# EAGLE board Telemetry Board 3 (EAGLE 7.6.0)
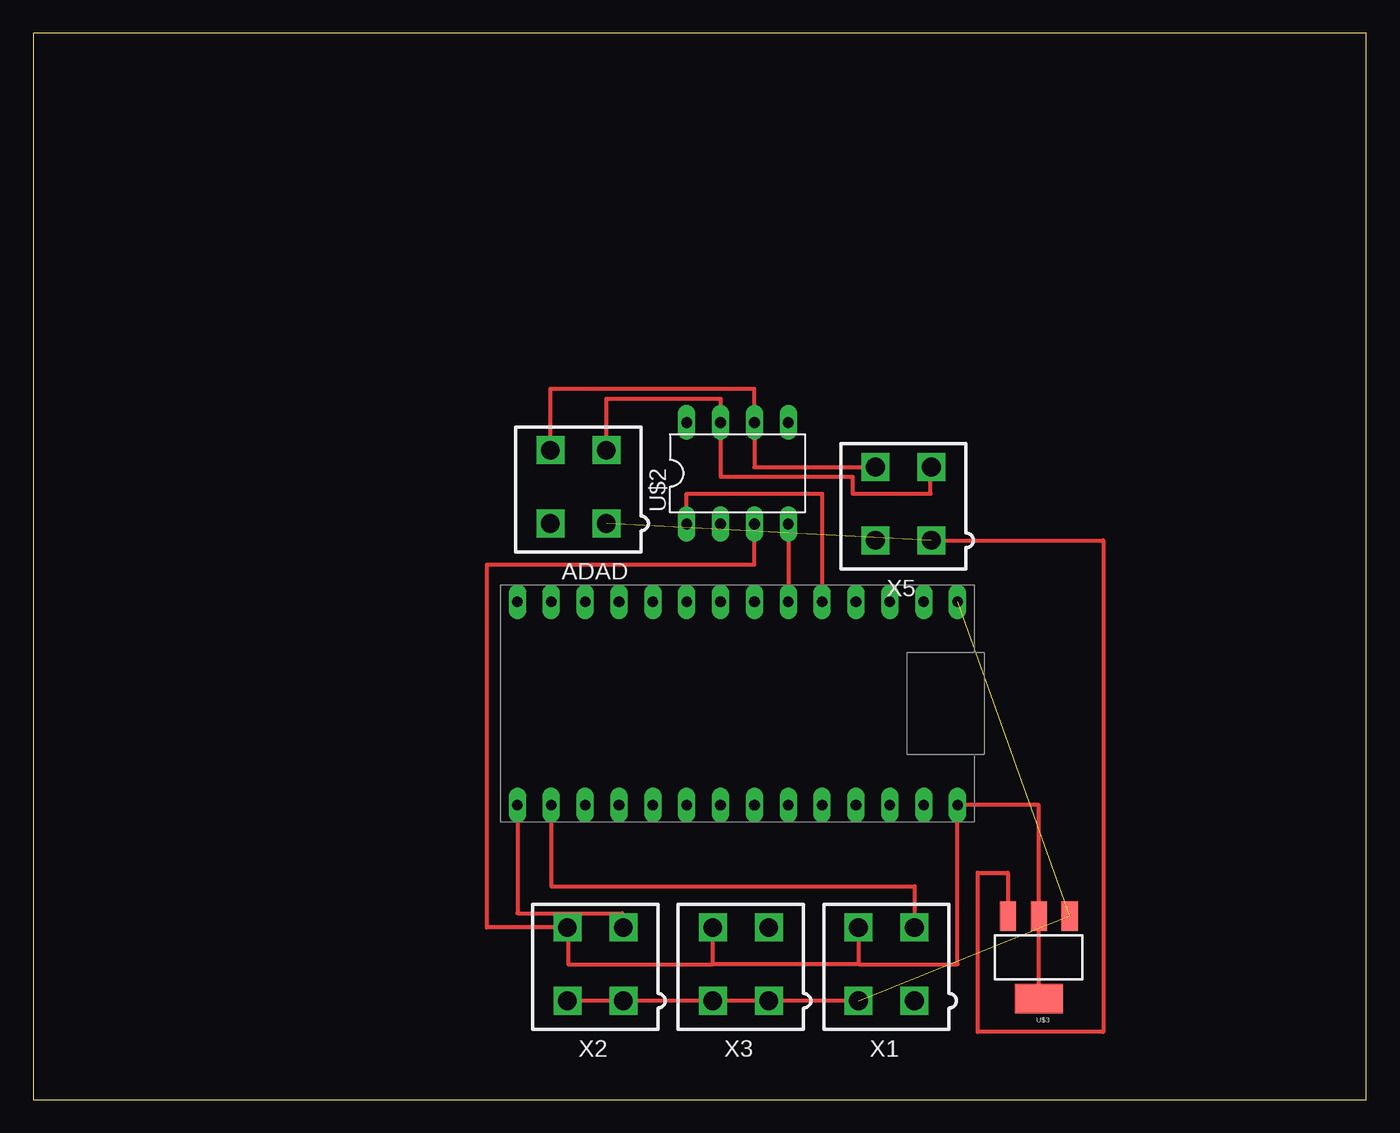
[diagram p0: board, top side]
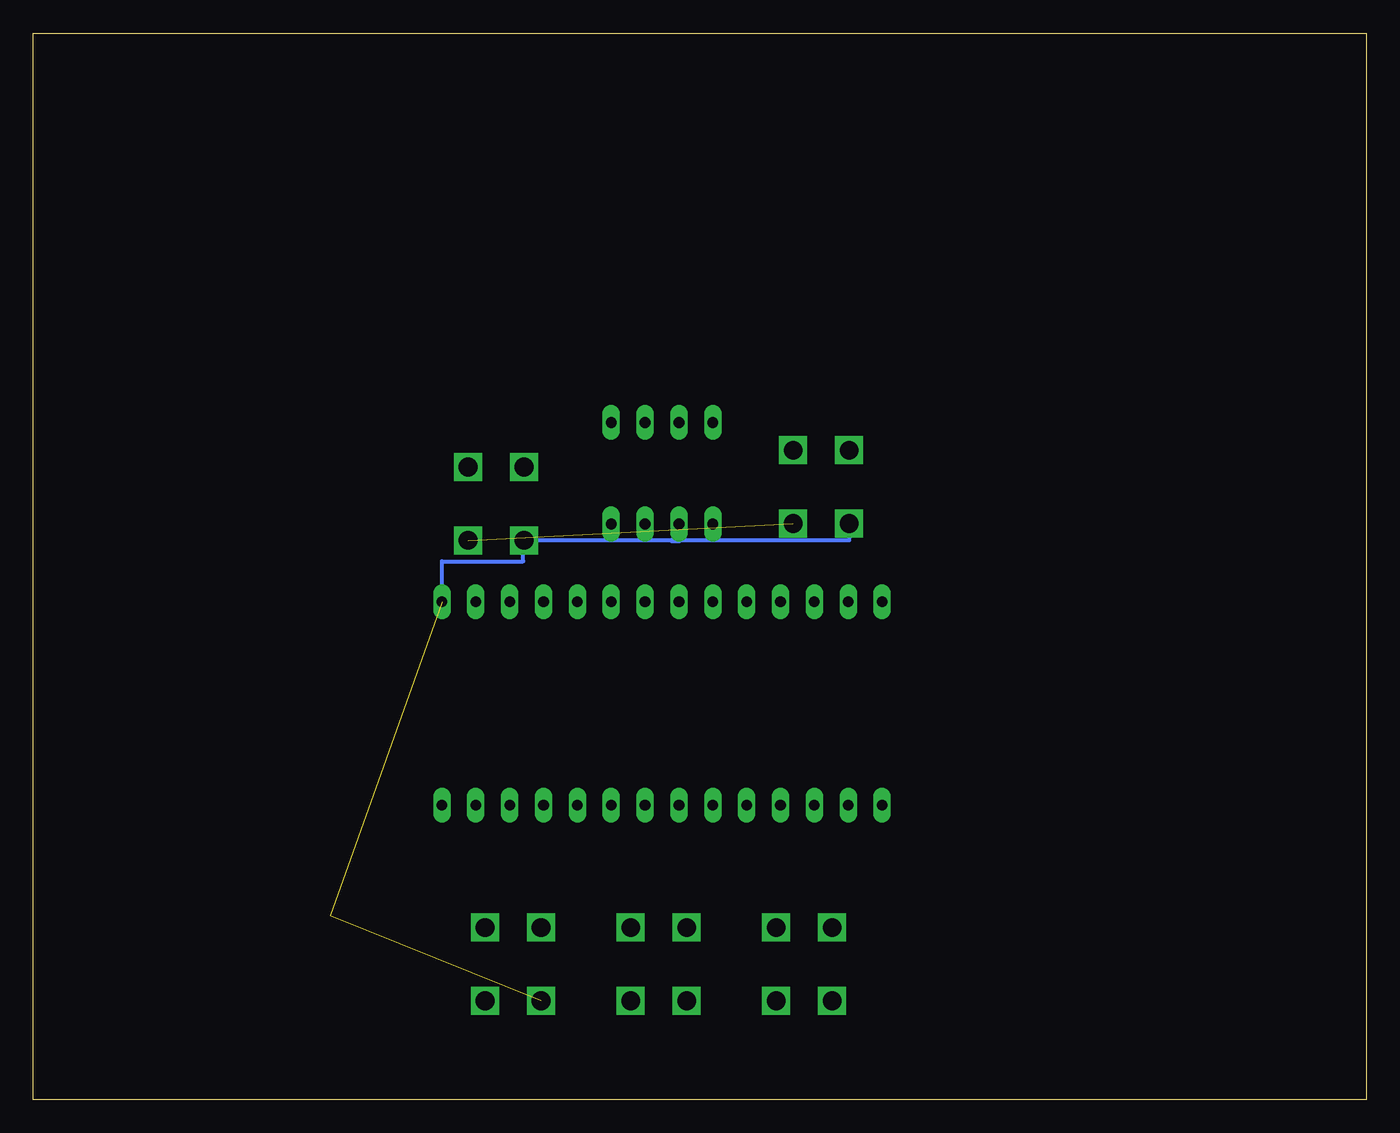
[diagram p1: board, bottom side, seen from below]

Size 100 x 80 mm. Coordinates in mm from the lower left corner, seen from the top.
Outline: 0,0 100,0 100,80 0,80 0,0
Copper layers (1*16): Top 0.035mm / dielectric 1.5mm / Bottom 0.035mm
Design rules "default": minimum track width 10mil, minimum drill 24mil, track to track 8mil, track to pad 8mil, pad to pad 8mil, via to via 8mil, smd to smd 8mil, copper to edge 40mil, drill to drill 8mil, minimum pad ring 10mil, minimum via ring 8mil, stop-mask expansion 4mil, vias tented up to drill 0mil, thermal gap 10mil

## Footprints (pad centres in the part's own frame; a part is rotated, then mirrored left to right if it is on the bottom)
MINIFIT_5566-4 = drill 1.4 square: 1 2.1,-2.75; 2 -2.1,-2.75; 3 2.1,2.75; 4 -2.1,2.75
TEENSY_3.2_SIMPLE = drill 0.8 long: 3.3V 16.51,29.21; A0 16.51,3.81; A1 16.51,6.35; A2 16.51,8.89; A3 16.51,11.43; A4 16.51,13.97; A5 16.51,16.51; A6 16.51,19.05; A7 16.51,21.59; A8 16.51,24.13; A9 16.51,26.67; AGND 16.51,31.75; D0(RX1) 1.27,31.75; D1(TX1) 1.27,29.21; D2 1.27,26.67; D3(CANTX) 1.27,24.13; D4(CANRX) 1.27,21.59; D5 1.27,19.05; D6 1.27,16.51; D7(RX3) 1.27,13.97; D8(TX3) 1.27,11.43; D9(RX2) 1.27,8.89; D10(TX2) 1.27,6.35; D11 1.27,3.81; D12 1.27,1.27; D13 16.51,1.27; GND 1.27,34.29; VIN 16.51,34.29
DIL08 = drill 0.813 long: 1 -3.81,-3.81; 2 -1.27,-3.81; 3 1.27,-3.81; 4 3.81,-3.81; 5 3.81,3.81; 6 1.27,3.81; 7 -1.27,3.81; 8 -3.81,3.81
SOT223 = smd 1.219 x 2.235: 1 -2.311,-3.099; 2 0,-3.099; 3 2.311,-3.099 | smd 3.6 x 2.2: 4 0,3.099

## Placement (x,y rotation side)
ADAD  MINIFIT_5566-4  [MINIFIT_5566-4]  40.89,45.97 0 top
U$1  TEENSY_3.2_SIMPLE  [TEENSY_3.2_SIMPLE]  35.05,38.61 270 top
U$2  MCP2551  [DIL08]  52.83,46.99 0 top
U$3  [SOT223]  75.44,10.67 180 top
X1  Suspension Sensor  [MINIFIT_5566-4]  64.01,10.16 0 top
X2  Wheel Sensor  [MINIFIT_5566-4]  42.16,10.16 0 top
X3  Tire Temperature Sensor  [MINIFIT_5566-4]  53.09,10.16 0 top
X5  MINIFIT_5566-4  [MINIFIT_5566-4]  65.28,44.7 0 top

## Library data of the parts
ADAD X1-X3 X5 = HyTechDevices; OC_FARNELL: unknown; OC_NEWARK: unknown
U$1-U$3 = HyTechDevices

## Nets
N$1: ADAD.1 U$3.3 X5.1
N$3: ADAD.3 U$2.7 X5.3
N$4: ADAD.4 U$2.6 X5.4
N$6: ADAD.2 U$1.GND U$2.2 U$3.1 X1.2 X2.2 X3.2 X5.2
N$9: U$1.D3(CANTX) U$2.1
N$10: U$1.D4(CANRX) U$2.4
N$12: X3.3
N$13: U$1.VIN U$2.3 U$3.2 U$3.4 X1.4 X2.4 X3.4
N$16: U$1.D13 X2.3
N$19: U$1.A0 X1.3

## Tracks (layer width: path | path; a pad name or v marks a point on that pad's centre or on a via)
N$1  (1 unrouted)
  Top 0.305: X5.1 80.26,41.95 80.26,5.08 70.87,5.08 70.87,17.02 73.1,17.02 U$3.3
N$3
  Top 0.305: ADAD.3 42.99,52.58 51.56,52.58 U$2.7 51.56,46.74 61.47,46.74 61.47,45.47 67.31,45.47 67.31,47.45 X5.3
N$4
  Top 0.305: ADAD.4 38.79,53.34 54.1,53.34 U$2.6 54.1,47.45 X5.4
N$6  (2 unrouted)
  Top 0.305: X1.2 X3.2 X2.2
  Bottom 0.305: U$2.2 51.56,41.95 | X5.2 52.07,41.95 38.79,41.95 ADAD.2 | U$1.GND 69.34,40.39 63.25,40.39 63.25,41.95
  Bottom 0.406: 51.56,41.95 52.07,41.95 | 63.25,41.95 X5.2
N$9
  Top 0.305: U$2.1 49.02,45.47 59.18,45.47 U$1.D3(CANTX)
N$10
  Top 0.305: U$2.4 U$1.D4(CANRX)
N$13
  Top 0.305: U$3.4 U$3.2 75.44,22.1 U$1.VIN 69.34,10.16 61.91,10.16 | X2.4 34.04,12.91 34.04,40.13 54.1,40.13 U$2.3 | 40.13,12.91 40.13,10.16 50.99,10.16 | 50.99,10.16 X3.4 | 61.91,10.16 50.99,10.16 | X1.4 61.91,10.16
  Top 0.406: X2.4 40.13,12.91
N$16
  Top 0.305: U$1.D13 36.32,13.97 44.2,13.97 44.2,12.91 X2.3
N$19
  Top 0.305: U$1.A0 38.86,16 66.11,16 X1.3